# EAGLE board SteinerVCF (EAGLE 9.6.2)
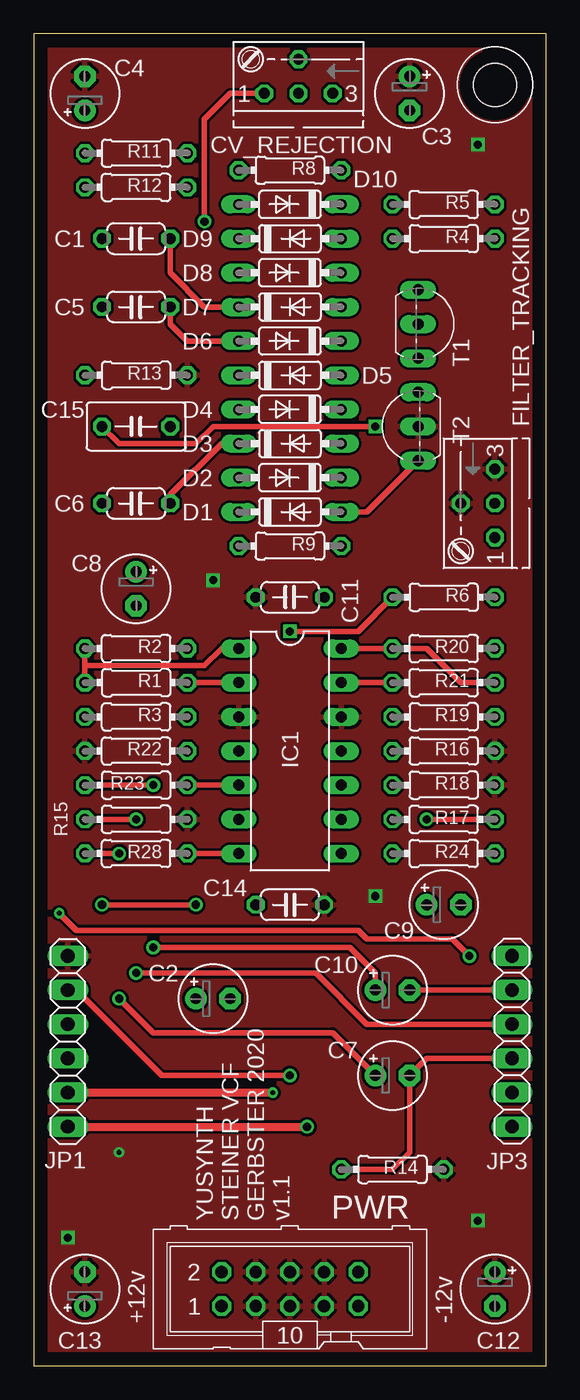
[diagram p0: board, top side]
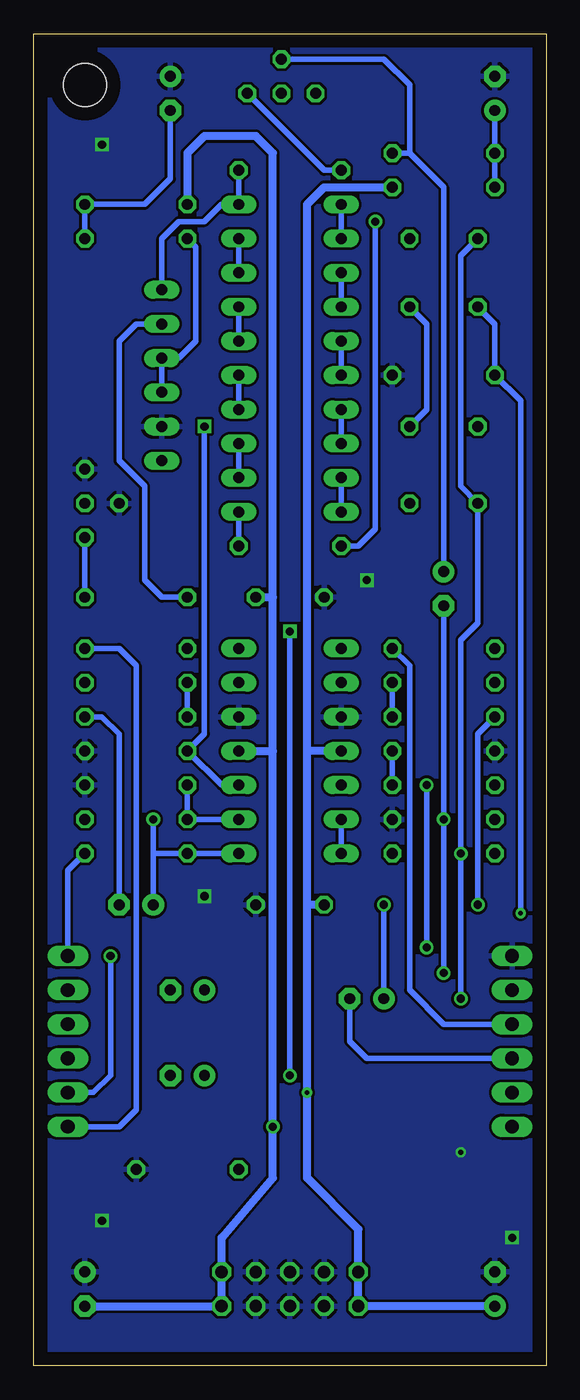
[diagram p1: board, bottom side, seen from below]

Size 38.1 x 99.06 mm. Coordinates in mm from the lower left corner, seen from the top.
Outline: 38.1,0 38.1,99.06 0,99.06 0,0 38.1,0
Copper layers (1*16): Top 0.035mm / dielectric 1.5mm / Bottom 0.035mm
Design rules "default": minimum track width 10mil, minimum drill 24mil, track to track 8mil, track to pad 8mil, pad to pad 8mil, via to via 8mil, smd to smd 8mil, copper to edge 40mil, drill to drill 8mil, minimum pad ring 10mil, minimum via ring 8mil, stop-mask expansion 4mil, vias tented up to drill 0mil, thermal gap 10mil
Holes 3.2 mm at 34.29,95.25

## Footprints (pad centres in the part's own frame; a part is rotated, then mirrored left to right if it is on the bottom)
C050-024X044 = drill 0.813 octagon: 1 -2.54,0; 2 2.54,0
E2,5-5 = drill 0.813 pad 1.6: + -1.27,0 | drill 0.813 pad 1.6 octagon: - 1.27,0
C050-035X075 = drill 0.813 octagon: 1 -2.54,0; 2 2.54,0
S64YW = drill 0.813 octagon: A 2.54,1.27; E -2.54,1.27; S 0,-1.27; S@1 0,1.27
DO35-7 = drill 0.813 long: A 3.81,0; C -3.81,0
DIL14 = drill 0.813 long: 1 -7.62,-3.81; 2 -5.08,-3.81; 3 -2.54,-3.81; 4 0,-3.81; 5 2.54,-3.81; 6 5.08,-3.81; 7 7.62,-3.81; 8 7.62,3.81; 9 5.08,3.81; 10 2.54,3.81; 11 0,3.81; 12 -2.54,3.81; 13 -5.08,3.81; 14 -7.62,3.81
1X06 = drill 1.016 long: 1 -6.35,0; 2 -3.81,0; 3 -1.27,0; 4 1.27,0; 5 3.81,0; 6 6.35,0
ML10 = drill 0.914 octagon: 1 -5.08,-1.27; 2 -5.08,1.27; 3 -2.54,-1.27; 4 -2.54,1.27; 5 0,-1.27; 6 0,1.27; 7 2.54,-1.27; 8 2.54,1.27; 9 5.08,-1.27; 10 5.08,1.27
0204/7 = drill 0.813 octagon: 1 -3.81,0; 2 3.81,0
TO92-CBE = drill 0.813 long: B 0,0; C -2.54,0; E 2.54,0

## Placement (x,y rotation side)
C1  1.5nF  [C050-024X044]  7.62,83.82 180 top
C2  10uF  [E2,5-5]  13.34,27.3 0 top
C3  47uF  [E2,5-5]  27.94,94.61 270 top
C4  47uF  [E2,5-5]  3.81,94.61 90 top
C5  1.5nF  [C050-024X044]  7.62,78.74 180 top
C6  1.5nF  [C050-024X044]  7.62,64.14 180 top
C7  2.2uF  [E2,5-5]  26.67,21.59 0 top
C8  2.2uF  [E2,5-5]  7.62,57.78 270 top
C9  47uF  [E2,5-5]  30.48,34.29 0 top
C10  10uF  [E2,5-5]  26.67,27.94 0 top
C11  .1uF  [C050-024X044]  19.05,57.15 180 top
C12  10uF  [E2,5-5]  34.29,5.71 270 top
C13  10uF  [E2,5-5]  3.81,5.71 90 top
C14  .1uF  [C050-024X044]  19.05,34.29 0 top
C15  680nF  [C050-035X075]  7.62,69.85 180 top
CV_REJECTION  1k  [S64YW]  19.68,95.89 180 top
D1  [DO35-7]  19.05,63.5 0 top
D2  [DO35-7]  19.05,66.04 180 top
D3  [DO35-7]  19.05,68.58 0 top
D4  [DO35-7]  19.05,71.12 180 top
D5  [DO35-7]  19.05,73.66 0 top
D6  [DO35-7]  19.05,76.2 180 top
D7  [DO35-7]  19.05,78.74 0 top
D8  [DO35-7]  19.05,81.28 180 top
D9  [DO35-7]  19.05,83.82 0 top
D10  [DO35-7]  19.05,86.36 180 top
FILTER_TRACKING  2k  [S64YW]  33.02,64.14 270 top
IC1  TL074P  [DIL14]  19.05,45.72 270 top
JP1  [1X06]  2.54,24.13 90 top
JP3  [1X06]  35.56,24.13 270 top
PWR  [ML10]  19.05,5.71 0 top
R1  10k  [0204/7]  7.62,50.8 180 top
R2  47k  [0204/7]  7.62,53.34 0 top
R3  10k  [0204/7]  7.62,48.26 0 top
R4  3.9k  [0204/7]  30.48,83.82 180 top
R5  82R  [0204/7]  30.48,86.36 0 top
R6  220R  [0204/7]  30.48,57.15 180 top
R8  1.8k  [0204/7]  19.05,88.9 180 top
R9  1.8k  [0204/7]  19.05,60.96 180 top
R11  1k  [0204/7]  7.62,90.17 180 top
R12  390R  [0204/7]  7.62,87.63 0 top
R13  1k  [0204/7]  7.62,73.66 180 top
R14  180k  [0204/7]  26.67,14.61 180 top
R15  180K  [0204/7]  7.62,40.64 180 top
R16  2.2M  [0204/7]  30.48,45.72 180 top
R17  47k  [0204/7]  30.48,40.64 0 top
R18  22k  [0204/7]  30.48,43.18 180 top
R19  10k  [0204/7]  30.48,48.26 180 top
R20  1k  [0204/7]  30.48,53.34 0 top
R21  220k  [0204/7]  30.48,50.8 0 top
R22  1M  [0204/7]  7.62,45.72 0 top
R23  220k  [0204/7]  7.62,43.18 180 top
R24  3.9k  [0204/7]  30.48,38.1 0 top
R28  1k  [0204/7]  7.62,38.1 0 top
T1  BC547C  [TO92-CBE]  28.57,77.47 270 top
T2  BC547C  [TO92-CBE]  28.57,69.85 90 top

## Library data of the parts
C1-C15 R1-R6 R8 R9 R11-R24 R28 = resistor
CV_REJECTION FILTER_TRACKING = pot
D1-D10 = diode
IC1 = linear
JP1 JP3 = pinhead
PWR = con-ml; OC_FARNELL: unknown; OC_NEWARK: unknown
T1 T2 = transistor

## Nets
+12V: C13.+ C14.1 IC1.4 JP1.2 PWR.1 PWR.2 R12.2
-12V: C11.1 C12.- IC1.11 JP1.1 PWR.9 PWR.10 R5.1
GND: C3.+ C4.- C11.2 C12.+ C13.- C14.2 FILTER_TRACKING.E FILTER_TRACKING.S IC1.3 IC1.12 JP1.6 PWR.3 PWR.4 PWR.5 PWR.6 PWR.7 PWR.8 R13.1 R14.1 R15.1 R16.1 R18.1 R22.1 T2.B
M_AUDIO_IN: C2.- JP1.3
M_AUDIO_OUT: JP3.6 R20.2
M_BP_IN: C7.- JP3.4 R14.2
M_CV_IN: JP1.5 R6.2 T1.B
M_HP_IN: C5.2 JP3.5 R13.2
M_LP_IN: C8.- JP3.3 R15.2
M_RES_A: JP3.1 R24.2
M_RES_B: C10.- JP3.2
M_SELECT_IN: JP1.4 R2.2
N$1: C2.+ R3.1
N$2: IC1.2 R1.1 R3.2
N$3: IC1.1 R1.2 R2.1
N$4: C3.- R4.1 R5.2
N$5: R4.2 T1.E T2.E
N$6: D1.A R9.1 T2.C
N$7: FILTER_TRACKING.A R6.1
N$8: D10.C R8.1 T1.C
N$9: D9.C D10.A
N$10: D8.C D9.A
N$11: C1.1 D7.C D8.A
N$12: D6.C D7.A
N$13: C15.2 IC1.10 R16.2
N$14: D4.C D5.A
N$15: C6.1 D3.C D4.A
N$16: D2.C D3.A
N$17: D1.C D2.A
N$18: CV_REJECTION.E R8.2
N$19: CV_REJECTION.A R9.2
N$20: C8.+ CV_REJECTION.S R11.1
N$21: C4.+ R11.2 R12.1
N$22: C1.2 C6.2 C7.+ R28.1
N$23: IC1.9 R17.1 R18.2
N$24: C9.+ IC1.8 R17.2 R24.1
N$25: IC1.13 R19.2 R21.1
N$26: C9.- R19.1
N$27: IC1.5 R22.2 R23.1
N$28: IC1.14 R20.1 R21.2
N$29: C10.+ R23.2
N$30: IC1.6 IC1.7 R28.2
N$35: C5.1 C15.1 D5.C D6.A

## Tracks (layer width: path | path; a pad name or v marks a point on that pad's centre or on a via)
+12V  (via drill 0.35)
  Top 0.61: JP1.2 v17.78,20.32
  Bottom 0.61: C13.+ PWR.1 PWR.2 13.97,10.16 17.78,13.97 v17.78,20.32 17.78,34.29 | C14.1 17.78,34.29 | 17.78,34.29 17.78,45.72 | IC1.4 17.78,45.72 | 17.78,45.72 17.78,86.36 16.51,87.63 R12.2
-12V  (via drill 0.61)
  Top 0.61: JP1.1 v20.32,17.78
  Bottom 0.61: C12.- PWR.9 PWR.10 24.13,9.53 20.32,13.97 v20.32,17.78 20.32,45.72 | IC1.11 20.32,45.72 | 20.32,45.72 20.32,57.15 | C11.1 20.32,57.15 | 20.32,57.15 20.32,90.17 21.59,91.44 25.4,91.44 26.67,90.17 R5.1
GND  (via drill 0.35, 0.6)
  other vias: 33.02,90.81 25.4,34.92 33.02,10.79 2.54,9.53 13.34,58.42 6.35,15.88
  pour Bottom: 0,0 0,99.06 38.1,99.06 38.1,0
  pour Top: 38.1,0 0,0 0,99.06 38.1,99.06
M_AUDIO_IN
  Bottom 0.406: JP1.3 13.34,22.86 14.61,24.13 C2.-
M_AUDIO_OUT
  Bottom 0.406: R20.2 31.75,53.34 30.48,52.07 30.48,19.05 31.75,17.78 JP3.6
M_BP_IN
  Top 0.406: JP3.4 29.21,22.86 C7.- 27.94,15.88 26.67,14.61 R14.2
M_CV_IN  (via drill 0.6)
  Top 0.406: v19.05,21.59 9.53,21.59 3.17,27.94 JP1.5 | v19.05,54.61 24.13,54.61 R6.2
  Bottom 0.406: R6.2 28.57,57.15 29.84,58.42 29.84,65.41 31.75,67.31 31.75,76.2 30.48,77.47 T1.B | v19.05,21.59 v19.05,54.61
M_HP_IN  (via drill 0.35, 0.6)
  Top 0.406: v32.38,30.48 31.11,31.75 24.77,31.75 24.13,32.38 3.17,32.38 v1.91,33.66
  Bottom 0.406: C5.2 3.81,77.47 R13.2 1.91,71.75 v1.91,33.66 | JP3.5 33.66,20.32 32.38,21.59 v32.38,30.48
M_LP_IN  (via drill 0.6)
  Top 0.406: v7.62,40.64 R15.2 | v7.62,29.21 20.95,29.21 24.77,25.4 JP3.3
  Bottom 0.406: C8.- v7.62,40.64 v7.62,29.21
M_RES_A
  Bottom 0.406: JP3.1 35.56,36.83 R24.2
M_RES_B
  Top 0.406: C10.- JP3.2
M_SELECT_IN
  Bottom 0.406: R2.2 10.16,52.07 10.16,27.94 7.62,25.4 JP1.4
N$1  (via drill 0.6)
  Top 0.406: v5.08,34.29 v12.06,34.29
  Bottom 0.406: R3.1 5.08,46.99 v5.08,34.29 | v12.06,34.29 C2.+
N$2
  Top 0.406: IC1.2 R1.1
  Bottom 0.406: R3.2 R1.1
N$3
  Top 0.406: IC1.1 13.97,53.34 12.7,52.07 3.81,52.07 | 3.81,52.07 R1.2 | R2.1 3.81,52.07
N$4
  Bottom 0.406: R4.1 R5.2 29.84,86.36 27.94,88.27 C3.-
N$5
  Bottom 0.406: T2.E T1.E 27.3,74.93 26.04,76.2 26.04,83.19 R4.2
N$6
  Top 0.406: D1.A 24.77,63.5 T2.C
  Bottom 0.406: R9.1 D1.A
N$7
  Bottom 0.406: R6.1 FILTER_TRACKING.A
N$8
  Bottom 0.406: R8.1 D10.C 24.13,86.36 25.4,85.09 27.3,85.09 28.57,83.82 T1.C
N$9
  Bottom 0.406: D10.A D9.C
N$10
  Bottom 0.406: D8.C D9.A
N$11
  Top 0.406: D7.C 12.7,78.74 10.16,81.28 C1.1
  Bottom 0.406: D8.A D7.C
N$12
  Bottom 0.406: D6.C D7.A
N$13  (via drill 0.6)
  Top 0.406: v25.4,69.85 13.34,69.85 12.06,68.58 6.35,68.58 C15.2
  Bottom 0.406: IC1.10 24.13,43.18 R16.2 25.4,46.99 v25.4,69.85
N$14
  Bottom 0.406: D4.C D5.A
N$15
  Top 0.406: C6.1 10.16,64.77 13.97,68.58 D3.C
  Bottom 0.406: D4.A D3.C
N$16
  Bottom 0.406: D2.C D3.A
N$17
  Bottom 0.406: D2.A D1.C
N$18
  Bottom 0.406: R8.2 16.51,88.9 CV_REJECTION.E
N$19  (via drill 0.6)
  Top 0.406: v12.7,85.09 12.7,92.71 14.61,94.61 CV_REJECTION.A
  Bottom 0.406: R9.2 13.97,60.96 12.7,62.23 v12.7,85.09
N$20
  Bottom 0.406: R11.1 10.16,90.17 | 10.16,90.17 7.62,87.63 C8.+ | CV_REJECTION.S 12.06,97.16 10.16,95.25 10.16,90.17
N$21
  Bottom 0.406: C4.+ R12.1 | 3.81,88.9 R12.1 | R12.1 R11.2
N$22  (via drill 0.6)
  Top 0.406: R28.1 v6.35,38.1 | v6.35,27.3 8.89,24.77 22.23,24.77 C7.+
  Bottom 0.406: C1.2 6.35,82.55 6.35,65.41 C6.2 5.08,55.24 6.35,53.98 v6.35,38.1 v6.35,27.3
N$23
  Bottom 0.406: R18.2 R17.1 IC1.9
N$24  (via drill 0.6)
  Top 0.406: R17.2 v29.21,40.64
  Bottom 0.406: IC1.8 R24.1 29.21,38.1 | 29.21,38.1 v29.21,40.64 | C9.+ 29.21,38.1
N$25
  Top 0.406: R21.1 IC1.13
  Bottom 0.406: R19.2 R21.1
N$26
  Bottom 0.406: C9.- 31.75,46.99 33.02,48.26 R19.1
N$27
  Top 0.406: IC1.5 R23.1
  Bottom 0.406: R23.1 R22.2
N$28
  Top 0.406: IC1.14 R20.1 29.21,53.34 31.75,50.8 R21.2
N$29  (via drill 0.6)
  Top 0.406: R23.2 v8.89,43.18 | v8.89,31.11 23.5,31.11 25.4,29.21 C10.+
  Bottom 0.406: v8.89,43.18 v8.89,31.11
N$30
  Top 0.406: R28.2 IC1.7
  Bottom 0.406: IC1.7 IC1.6
N$35
  Top 0.406: D6.A 11.43,76.2 10.16,77.47 C5.1
  Bottom 0.406: D6.A D5.C | C15.1 8.89,71.12 8.89,77.47 C5.1

## Text on the board
tNames: YUSYNTH / STEINER VCF / GERBSTER 2020 / v1.1 | +12v | -12v